# Altium PCB CS_JFETOnSemiSOT23_Simple_v1.PcbDoc
Units mm, origin at the board's own origin, x right, y up, seen from the top; angles counter-clockwise.
Board outline 40 x 8 mm, 2 copper layers (Top Layer, Bottom Layer); 17 components, 8 nets, 40 pads, 4 vias.
Unrouted connection lines stored in the file: 1.
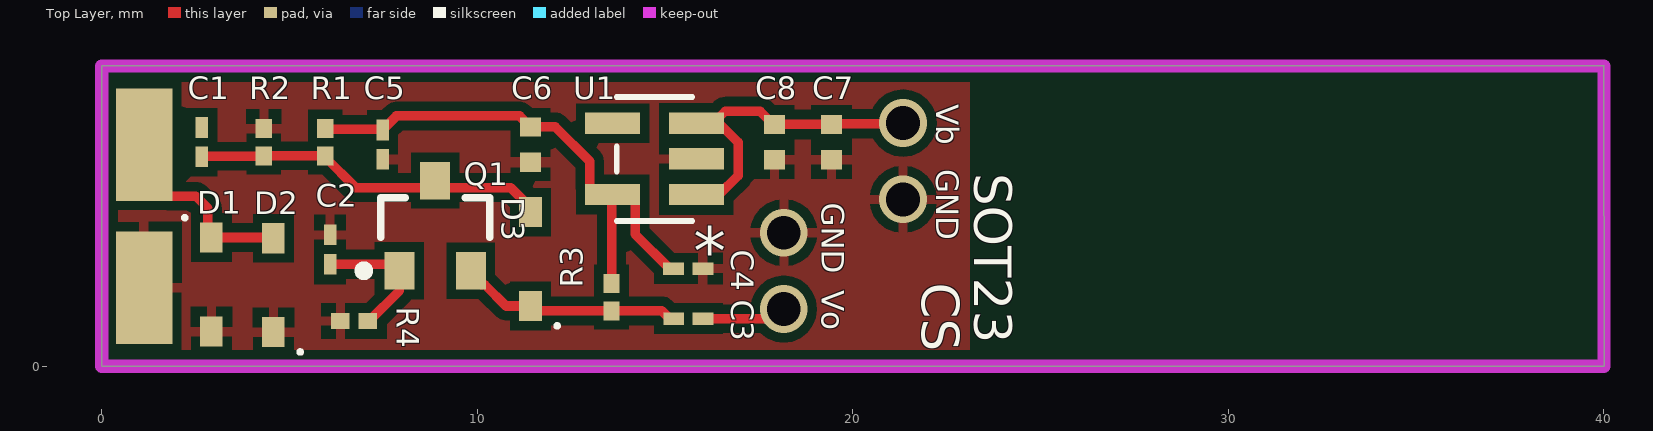
[diagram p0: Top Layer view]
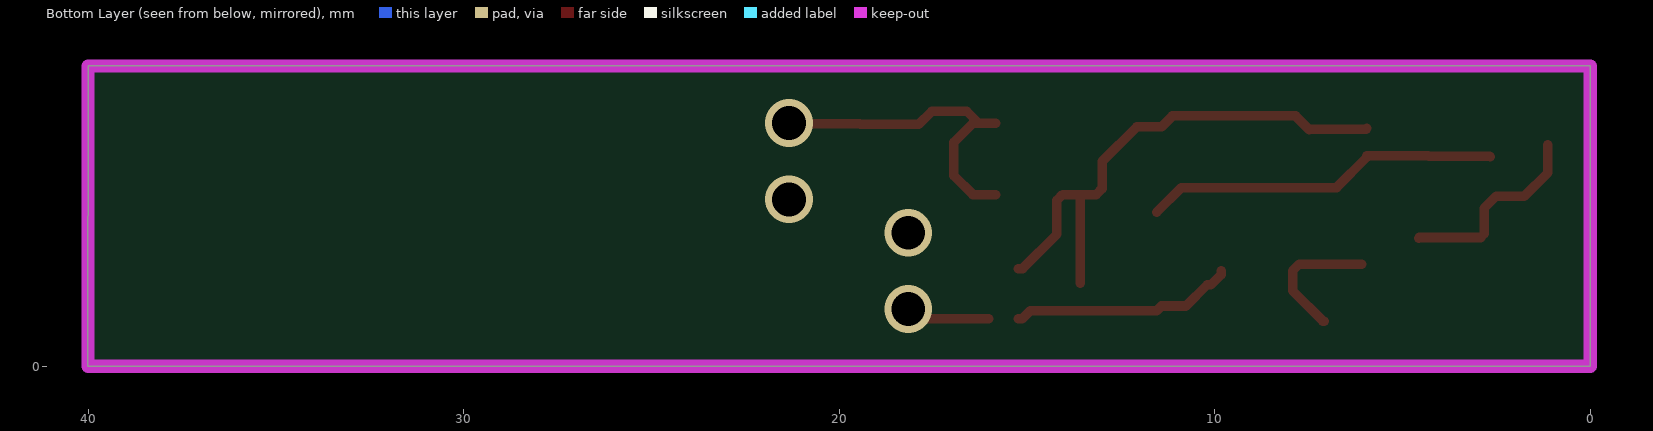
[diagram p1: Bottom Layer view, seen from below]

## Layer stack, top to bottom
Top Solder: solder mask 0.0102, Solder Resist, Dk 3.5
Top Layer: signal copper 0.0356
Dielectric 1: dielectric 0.32, FR-4, Dk 4.8
Bottom Layer: signal copper 0.0356
Bottom Solder: solder mask 0.0102, Solder Resist, Dk 3.5

## Board outline
0,0 40.005,0 40,8 0,8

## Design rules (kind name [scope] priority, off if disabled: settings)
Clearance [All] p1: gap=0.254 ignorepadtopadclearanceinfootprint=FALSE except(0: Arc-Hole Track-Hole SMDPad-Hole THPad-Hole Via-Hole Fill-Hole Poly-Hole Region-Hole Text-Hole)
PolygonConnect [All] p1: connectstyle=Relief reliefconductorwidth=0.254 reliefentries=4 polygonreliefangle="90 Angle" airgapwidth=0.254
RoomDefinition CS_JFETOnSemiSOT23_Simple_v1 [InComponentClass('CS_JFETOnSemiSOT23_Simple_v1')] p1: confinementstyle=ConfineIn formatcopy=TRUE lockcomponents=FALSE outline 0,0 40.005,0 40.005,8 0,8
RoutingVias [All] p1: holewidth=0.711 width=1.27 viastyle="Through Hole" minholewidth=0.711 minwidth=1.27 maxholewidth=0.711 maxwidth=1.27
SolderMaskExpansion [All] p1: expansion=0.102
Width [All] p1: maxlimit=0.254 minlimit=0.254 preferedwidth=0.254
30 further rules are at their usual default settings.

## Components (designator, comment, footprint, x,y, rotation, side; value= is the part's Value field where it differs from the comment)
C1 "Cin" C0201 2.667,5.968 r270 top value=Value
C2 "" C0201 6.082,3.109 r270 top value=Value
C3 "" C0201 15.621,1.269 r0 top value=Value
C4 "" CAP_CBR_0201 15.617,2.601 r180 top value=Value
C5 "" CAP_CBR_0201 7.479,5.903 r90 top value=Value
C6 "" YAG_CC0402 11.416,5.903 r90 top value=Value
C7 "" YAG_CC0402 19.431,5.968 r90 top value=Value
C8 "" YAG_CC0402 17.907,5.968 r90 top value=Value
D1 "" INF-SOD323_V 2.921,2.178 r0 top
D2 "" INF-SOD323_V 4.572,2.158 r180 top
D3 "" INF-SOD323_V 11.416,2.855 r180 top
Q1 "2SK2394-6-TB-E" ONSC-CP-3-318AN_A_V 8.876,3.744 r90 top
R1 "" RES_RC0201_P6XP3 5.95,5.968 r90 top value=Value
R2 "" RES_RC0201_P6XP3 4.314,5.968 r270 top value=Value
R3 "" RES_RC0201_P6XP3 13.575,1.839 r90 top value=Value
R4 "" RES_RC0201_P6XP3 6.717,1.204 r0 top value=Value
U1 "" DBV5 14.718,5.522 r180 top value=Value

## Footprints (in the part's own frame and the unit in brackets; to place one, negate y for a bottom-side part, rotate by r counter-clockwise, add the part's x,y. Pads: shape width x height; smd on the part's side, far side on the other; paste and mask are expansions set on the pad)
C0201 [mil]
  rect 21.78x13 smd paste+0 mask+0: 1(-15.39,0) 2(15.39,0)
  body extent 0,0 10,10, height 10
CAP_CBR_0201 [mil]
  rect 21.78x13 smd paste+0 mask+0: 1(-15.39,0) 2(15.39,0)
  body extent 0,0 10,10, height 10
DBV5 [mil]
  rect 57.56x22.36 smd paste+0 mask+0: 1(-44,37.4) 2(-44,0) 3(-44,-37.4) 4(44,-37.4) 5(44,37.4)
  silkscreen extent -40,-65 40,65, body extent 0,0 10,10, height 10
INF-SOD323_V [mm] "SOD, 2-Leads, Body 1.7x1.25 mm"
  rect 0.6x0.8 smd: 1(0,1.25) 2(0,-1.25)
  silkscreen extent -0.76,1.73 -0.66,1.83, body extent -0.63,-0.85 0.63,0.85, height 1.1
ONSC-CP-3-318AN_A_V [mm] "SOT23, 3-Leads, Body 2.9x1.5mm, Pitch 0.95mm"
  rect 1x0.8 smd: 1(-1.2,0.95) 2(-1.2,-0.95) 3(1.2,0)
  silkscreen extent -1.32,-1.45 0.75,2.02, body extent -0.75,-1.45 0.75,1.45, height 1.31
RES_RC0201_P6XP3 [mm]
  rect 0.503x0.43 smd paste+0 mask+0: 1(-0.366,0) 2(0.366,0)
  body extent 0,0 0.25,0.25, height 0.25
YAG_CC0402 [mil]
  rect 20x22 smd paste+0 mask+0: 1(-18.5,0) 2(18.5,0)
  body extent 0,0 10,10, height 10

## Part data
C1 C2 C3: library part C0201C270J3GACTU, "No Description Available", Built_By=EMA_UL_Team, Copyright="Copyright (C) 2018 Accelerated Designs. All rights reserved", Manufacturer_Part_Number=C0201C270J3GACTU, RefDes=RefDes, Type=DEV, Vendor=Kemet
C4 C5: library part CBR02C399C3GAC, "No Description Available", Built_By=EMA_UL_Team, Copyright="Copyright (C) 2018 Accelerated Designs. All rights reserved", Manufacturer_Part_Number=CBR02C399C3GAC, RefDes=RefDes, Type=DEV, Vendor=KEMET
C6 C7 C8: library part CC0402KRX7R9BB10, "No Description Available", Manufacturer_Part_Number=CC0402KRX7R9BB103, Built_By=EMA_UL_Team, Copyright="Copyright (C) 2018 Accelerated Designs. All rights reserved", RefDes=RefDes, Type=DEV, Vendor=Yageo
D1 D2 D3: library part BAT15-03W, "Single Silicon Schottky Diode, 110 mA IF Max, SOD32, Green", Manufacturer=Infineon, Supplier Part Number 1=N/A, ComponentLink1Description="Manufacturer URL", ComponentLink1URL=http://www.infineon.com/, ComponentLink2Description=Datasheet, ComponentLink2URL=http://www.infineon.com/dgdl/bat15series.pdf?folderId=db3a304314dca3890114ff6812070b44&fileId=db3a304314dca3890114ff6b74ca0b48&location=en.Products.RF.RF_Mixer___Detector_Schottky_Diodes.DATASHEET.bat15series.pdf, ComponentLink3Description="Package Specification", ComponentLink3URL=http://www.infineon.com/dgdl/SOD323-Package_Overview.pdf?folderId=db3a30431936bc4b011952aab84f3bbe&fileId=db3a30431936bc4b011952beed653be3, Configuration=Single, CT (typ)="0.26 pF", DatasheetVersion=Jun-2011, Green=yes, Group="RF Mixer", IF (max)="110 mA", Mounting Technology="Surface Mount", PackageDescription="2-Pin Small Outline Diode Package, 1.25 x 1.7 mm Body", PackageReference=SOD323, PartNumber=BAT15-03W, Supplier 1=Mouser, VF (typ)="0.23 V", VR (max)="4 V"
Q1: "N-Channel JFET, 15 V, 10 to 20 mA, 38 mS, 3-Pin CP, Pb-Free, Tape and Reel", Manufacturer="On Semiconductor", Supplier Part Number 1=2SK2394-6-TB-E-ND, Channel Polarity="N Channel", ComponentLink1Description="Manufacturer URL", ComponentLink1URL=http://www.onsemi.com/, ComponentLink2Description=Datasheet, ComponentLink2URL=http://www.onsemi.com/pub_link/Collateral/EN4839-D.PDF, ComponentLink3Description="Package Specification", ComponentLink3URL=http://www.onsemi.com/pub_link/Collateral/EN6619-D.PDF, IDSS Max (uA)=20000, IDSS Min (uA)=10000, Mounting Technology="Surface Mount", PackageDescription="3-Pin Small Outline Transistor, Body 2.9 x 1.5 mm, Pitch 0.95 mm", PackageReference=CP-3-318AN_A, Packing="Tape and Reel", PartNumber=2SK2394-6-TB-E, RoHS=Pb-Free, Supplier 1=Digi-Key, Supplier 2=Mouser, Supplier Part Number 2=863-2SK2394-6-TB-E
R1 R2 R3 R4: library part RC0201FR-0718KL, "No Description Available", Built_By=EMA_Anthony, Copyright="Copyright (C) 2018 Accelerated Designs. All rights reserved", Manufacturer_Part_Number=RC0201FR-0718KL, RefDes=RefDes, Type=DEV, Vendor=Yageo
U1: library part LP5907MFX-3.3/NO, "No Description Available", Manufacturer_Part_Number=LP5907MFX-3.3/NOPB, Built_By=EMA_UL_Team, Copyright="Copyright (C) 2018 Accelerated Designs. All rights reserved", RefDes=RefDes, Type=DEV, Vendor="Texas Instruments"

## Free pads (board coordinates)
  rect 1.5x3 smd: ""(1.129,2.093) ""(1.129,5.903)

## Via types
v1: diameter 1.27, hole 0.9, Top Layer to Bottom Layer, 4 vias

## Nets (pads, with @x,y where several pads share a name; then routed paths per layer and width w, separated by ;. In a path a pad name is that pad's centre, name@x,y a point inside that pad or via, vN(x,y) a via of type N, cw(c..) or ccw(c..) an arc to the next point about the centre after c; other vN are vias at no path point)
D: C3.1 D3.1 Q1.2 R3.1 | length 6
  Top Layer w0.254: Q1.2 9.826,2.444 10.099,2.17 10.199,2.17 10.765,1.605 D3.1 11.548,1.473 R3.1 14.915,1.473 15.119,1.269 C3.1
G: C1.2 D3.2 Q1.3 R1.1 R2.2 | length 9.5
  Top Layer w0.254: C1.2 2.679,5.59 4.302,5.59 R2.2 R1.1 5.95,5.566 6.757,4.76 10.888,4.76 D3.2@11.543,4.104
GND: C2.1 C4.1 C5.1 C6.1 C7.1 C8.1 D1.2 D2.1 pad.@1.129,2.093 R2.1 R4.1 U1.2
  other v1: 18.161,3.555 21.336,4.444
S: C2.2 Q1.1 R4.2 | length 3.6
  Top Layer w0.254: C2.2 7.752,2.718 Q1.1 7.926,2.01 7.119,1.204 R4.2
Vbatt: C7.2 C8.2 U1.1 U1.3 | length 8.9
  Top Layer w0.254: U1.1 16.439,4.571 16.947,5.08 16.947,5.963 16.439,6.472 U1.3@16.282,6.472 ; U1.3 U1.3@16.282,6.472 ; v1(21.336,6.476) 21.317,6.457 19.45,6.457 C7.2 C8.2 17.882,6.438 17.528,6.792 16.602,6.792 U1.3@16.282,6.472
Vcc: C4.2 C5.2 C6.2 R1.2 R3.2 U1.5 | length 14.5
  Top Layer w0.254: R1.2 5.97,6.314 7.458,6.314 C5.2 C5.2 7.848,6.665 11.124,6.665 C6.2 12.076,6.372 12.996,5.452 12.996,4.728 13.153,4.571 U1.5 ; R3.2 13.575,4.546 U1.5 ; C4.2 15.114,2.601 14.204,3.511 14.204,4.414 14.047,4.571 U1.5
Vin: C1.1 D1.1 D2.2 pad.@1.129,5.903 | length 5.3
  Top Layer w0.254: pad.@1.129,5.903 1.129,5.153 1.752,4.53 2.502,4.53 2.822,4.21 2.822,3.528 D1.1 4.552,3.428 D2.2
Vout: C3.2 | length 2.3
  Top Layer w0.254: C3.2 17.632,1.269 17.886,1.523 v1(18.161,1.523)
pads on no net: U1.4

## Polygon pours and split planes (outlines as drawn)
GND on Top Layer "Top Layer-No Net 3" (solid, pour order 0): 0,7.873 0.127,8.001 22.987,8 23.114,7.873 23.114,0.126 22.987,-0.001 0.127,-0.001 0,0.126

## Keep-outs
Keep-Out Layer:
  the board outline again, w0.35

## Silkscreen, mask and mechanical layers (free items; w line width, h text height)
Top Overlay:
  text "Vb" at 22.225,6.976 h0.6 r270
  text "GND" at 22.225,5.244 h0.6 r270
  text "SOT23" at 23.227,5.141 h1 r270
  text "GND" at 19.177,4.355 h0.6 r270
  text "CS" at 21.83,2.22 h1 r270
  text "Vo" at 19.177,2.023 h0.6 r270

## Text inside footprints (layer, text, board x,y; h text height)
U1: Top Overlay "*" at 16.623,4.252 h1.27 r180; Mechanical 13 "*" at 15.657,5.096 h1.27 r180